# EAGLE board Adafruit Ultimate GPS (EAGLE 6.2)
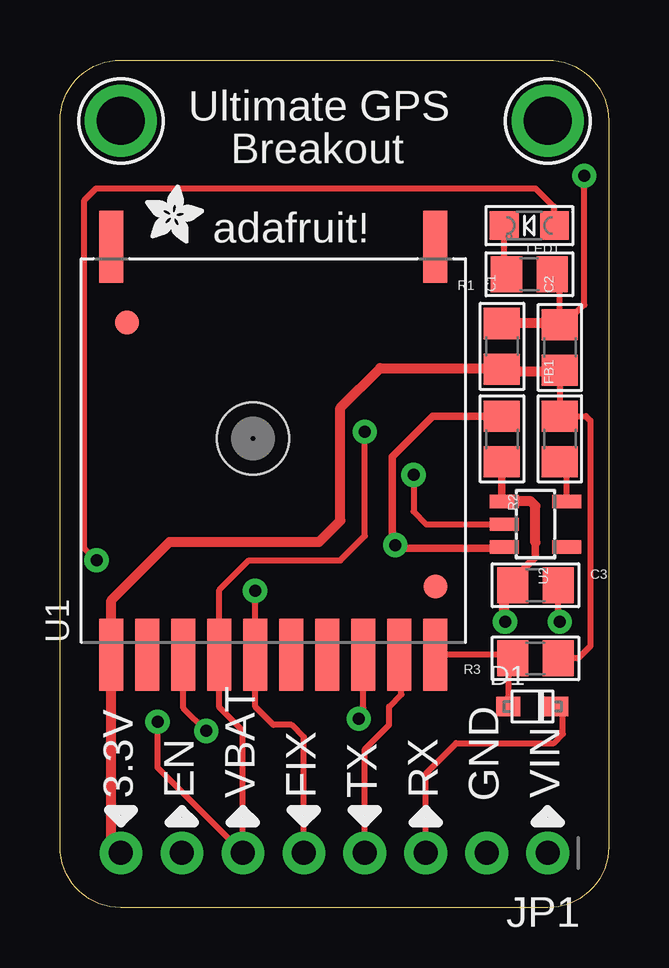
[diagram p0: board, top side]
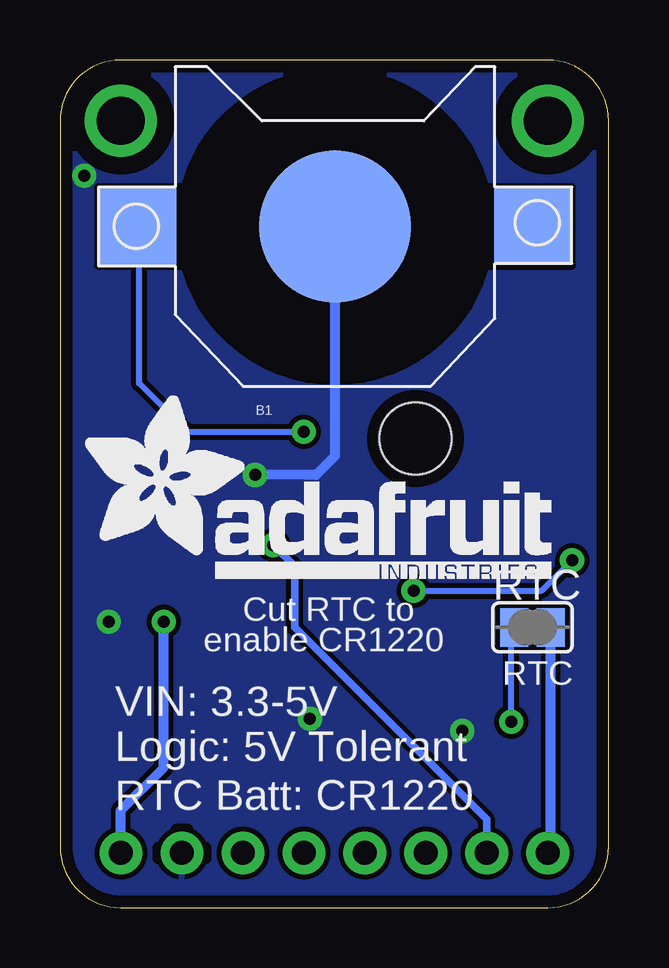
[diagram p1: board, bottom side, seen from below]

Size 22.86 x 35.32 mm. Coordinates in mm from the lower left corner, seen from the top.
Outline: 0,2.54 0,32.78 arc-90 2.54,35.32 20.32,35.32 arc-90 22.86,32.78 22.86,2.54 arc-90 20.32,0 2.54,0 arc-90 0,2.54
Copper layers (1*16): Top 0.035mm / dielectric 1.5mm / Bottom 0.035mm
Design rules: minimum track width 8mil, minimum drill 0.4mm, track to track 8mil, track to pad 8mil, pad to pad 8mil, via to via 8mil, smd to smd 8mil, copper to edge 20mil, drill to drill 8mil, minimum pad ring 8mil, minimum via ring 10mil, stop-mask expansion 3mil, vias tented up to drill 20mil, thermal gap 8mil
bRestrict: area 17.5,3.2 to 18,3.3; area 16.8,2 to 16.9,2.5; area 18.7,2 to 18.8,2.5

## Footprints (pad centres in the part's own frame; a part is rotated, then mirrored left to right if it is on the bottom)
CR1220 = smd 3.2 x 3.2: +$1 -8.225,0; +$2 8.225,0 | smd 6.35 x 6.35: - 0,0
0805 = smd 1.3 x 1.5: 1 -0.95,0; 2 0.95,0
SOD-323F = smd 1 x 0.8: A -1,0; C 1,0
FIDUCIAL_1MM = smd 1 x 1: 1 0,0
1X08_ROUND_70 = drill 1 pad 1.778: 1 -8.89,0; 2 -6.35,0; 3 -3.81,0; 4 -1.27,0; 5 1.27,0; 6 3.81,0; 7 6.35,0; 8 8.89,0
CHIPLED_0805 = smd 1.2 x 1.2: A 0,-1.05; C 0,1.05
SOLDERJUMPER_CLOSEDWIRE = smd 1.168 x 1.6: 1 -0.762,0; 2 0.762,0 | smd 0.635 x 0.203: WIRE 0,0
FGPMMOPA6B = smd 3 x 1: P$1 -8.5,6.75; P$2 -8.5,5.25; P$3 -8.5,3.75; P$4 -8.5,2.25; P$5 -8.5,0.75; P$6 -8.5,-0.75; P$7 -8.5,-2.25; P$8 -8.5,-3.75; P$9 -8.5,-5.25; P$10 -8.5,-6.75; P$11 8.5,6.75; P$12 8.5,-6.75 | hole 3: 0.5,0.85
SOT23-5 = smd 0.55 x 1.2: 1 -0.95,-1.3; 2 0,-1.3; 3 0.95,-1.3; 4 0.95,1.3; 5 -0.95,1.3
MOUNTINGHOLE_2.0_PLATED = drill 2 pad 3: P$1 0,0

## Placement (x,y rotation side)
B1  CR1220  [CR1220]  11.4,28.39 0 bottom
C1  0.1uF  [0805]  18.41,23.39 90 top
C2  10uF  [0805]  20.83,23.34 90 top
C3  10uF  [0805]  19.81,13.44 0 top
D1  1N4148  [SOD-323F]  19.68,8.38 0 top
FB1  Ferrite  [0805]  20.83,19.53 90 top
FID1  FIDUCIAL""  [FIDUCIAL_1MM]  2.79,24.38 0 top
FID2  FIDUCIAL""  [FIDUCIAL_1MM]  15.64,13.38 0 top
JP1  [1X08_ROUND_70]  11.43,2.29 180 top
LED1  FIX  [CHIPLED_0805]  19.56,28.42 90 top
R1  1K  [0805]  19.56,26.39 180 top
R2  10K  [0805]  18.41,19.53 270 top
R3  10K  [0805]  19.81,10.39 180 top
RTC  [SOLDERJUMPER_CLOSEDWIRE]  3.17,11.68 0 bottom
U1  FGPMMOPA6B  [FGPMMOPA6B]  8.89,19.05 90 top
U2  RT9193-3.3  [SOT23-5]  19.81,15.98 270 top
U$8  MOUNTINGHOLE2.0  [MOUNTINGHOLE_2.0_PLATED]  2.54,32.78 0 top
U$9  MOUNTINGHOLE2.0  [MOUNTINGHOLE_2.0_PLATED]  20.32,32.78 0 top
U$15  [ADAFRUIT_2.5MM]  3.56,27.69 0 top
U$16  [ADAFRUIT_TEXT_20MM]  21.97,13.72 0 bottom

## Library data of the parts
B1 C1-C3 FB1 FID1 FID2 JP1 LED1 R1-R3 RTC U1 U2 U$8 U$9 U$15 U$16 = microbuilder
D1 = adafruit

## Nets
3.3V: C1.1 C2.1 FB1.2 JP1.8 R3.1 RTC.2 U1.P$1
ENABLE: JP1.7 R2.1 U2.3
FIX: JP1.5 LED1.A U1.P$5
GND: B1.- C1.2 C2.2 C3.2 JP1.2 R1.1 U1.P$3 U1.P$8 U2.2
N$2: LED1.C R1.2
N$3: FB1.1 U2.5
RX: D1.A R3.2 U1.P$10
RX_5V: D1.C JP1.3
TX: JP1.4 U1.P$9
VBACKUP: B1.+$1 JP1.6 RTC.1 U1.P$4
VIN: C3.1 JP1.1 R2.2 U2.1

## Tracks (layer width: path | path; a pad name or v marks a point on that pad's centre or on a via)
3.3V
  Top 0.254: 20.32,22.84 20.39,22.84 C2.1 | 20.83,22.35 FB1.2 21.91,20.48 22.1,20.3 22.1,10.9 21.59,10.39 R3.1
  Top 0.406: JP1.8 2.14,2.69 U1.P$1 2.14,12.81 4.57,15.24 10.79,15.24 11.68,16.13 11.68,20.83 13.34,22.48 18.41,22.48 C1.1 18.5,22.35 20.83,22.35 C2.1
  Bottom 0.406: RTC.2 2.41,2.41 JP1.8
ENABLE  (via drill 0.5)
  Top 0.305: U2.3 18.51,14.99 13.97,14.99 v13.97,15.11 13.84,15.24 13.84,18.8 15.53,20.48 R2.1
  Bottom 0.305: JP1.7 5.08,3.68 13.08,11.68 13.08,14.22 v13.97,15.11 13.84,15.11
FIX  (via drill 0.5)
  Top 0.254: JP1.5 10.16,7.11 9.65,7.62 8.89,7.62 8.14,8.37 U1.P$5 8.13,10.56 v8.13,13.21 | v1.52,14.48 1.02,14.99 1.02,29.48 1.51,29.97 19.81,29.97 20.57,29.21 20.57,28.46 LED1.A
  Bottom 0.254: v8.13,13.21 2.79,13.21 v1.52,14.48
GND  (via drill 0.5)
  Top 0.254: U1.P$3 5.14,8.32 v6.1,7.37 | C2.2 20.83,26.07 R1.1 | C2.2 21.02,24.29 | v21.84,30.5 21.84,25.12 21.82,25.12 21.34,24.64 21.17,24.64 C2.2 | C3.2 20.76,11.85 v20.83,11.91 | U1.P$8 12.64,8.32 v12.45,7.87 | U2.2 15.26,15.98 14.73,16.51 v14.73,18.03
  Top 0.406: C1.2 18.46,24.38 20.74,24.38 C2.2
  Bottom 0.406: B1.- 11.4,18.83 12.19,18.03 v14.73,18.03
  pour Bottom (isolate 0.203): 0,0 0,35.32 22.86,35.32 22.86,0
N$2
  Top 0.254: LED1.C 18.51,26.49 R1.2
N$3
  Top 0.254: U2.5 21.11,18.05 FB1.1
RX
  Top 0.254: D1.A 18.71,10.24 R3.2 18.7,10.55 U1.P$10
RX_5V
  Top 0.254: JP1.3 15.24,5.59 16.51,6.86 20.57,6.86 20.95,7.24 20.95,8.47 D1.C
TX
  Top 0.254: JP1.4 12.7,6.6 13.72,7.62 13.72,8.38 14.22,8.89 14.22,10.47 U1.P$9
VBACKUP  (via drill 0.5)
  Top 0.254: v12.7,19.83 12.7,15.49 11.68,14.48 7.87,14.48 6.64,13.24 U1.P$4 6.64,8.35 7.62,7.37 JP1.6 4.06,5.84 v4.06,7.75
  Bottom 0.254: B1.+$1 19.56,28.56 19.56,21.84 17.53,19.81 12.72,19.81 v12.7,19.83 | v4.06,7.75 4.06,11.56 RTC.1
VIN  (via drill 0.5)
  Top 0.254: 18.51,13.28 C3.1
  Top 0.305: C3.1 18.86,13.65 19.81,14.61 19.81,15.22 | 18.41,18.67 R2.2 18.41,17.02 U2.1
  Top 0.406: U2.1 19.62,16.93 19.81,16.74 19.81,15.22 | 18.51,13.28 18.51,11.94 v18.54,11.91
  Bottom 0.406: v18.54,11.91 18.54,5.84 20.32,4.06 JP1.1

## Text on the board
tPlace: Ultimate GPS | Breakout | adafruit! | 3.3V | EN | VBAT | FIX | TX | RX | VIN | GND
bPlace: Cut RTC to | enable CR1220 | RTC | VIN: 3.3-5V | Logic: 5V Tolerant | RTC Batt: CR1220